# Altium PCB xksoilsensor.PcbDoc
Units mm, origin at the board's own origin, x right, y up, seen from the top; angles counter-clockwise.
Board outline 63.12 x 55.12 mm, 2 copper layers (Top Layer, Bottom Layer); 46 components, 37 nets, 176 pads, 26 vias.
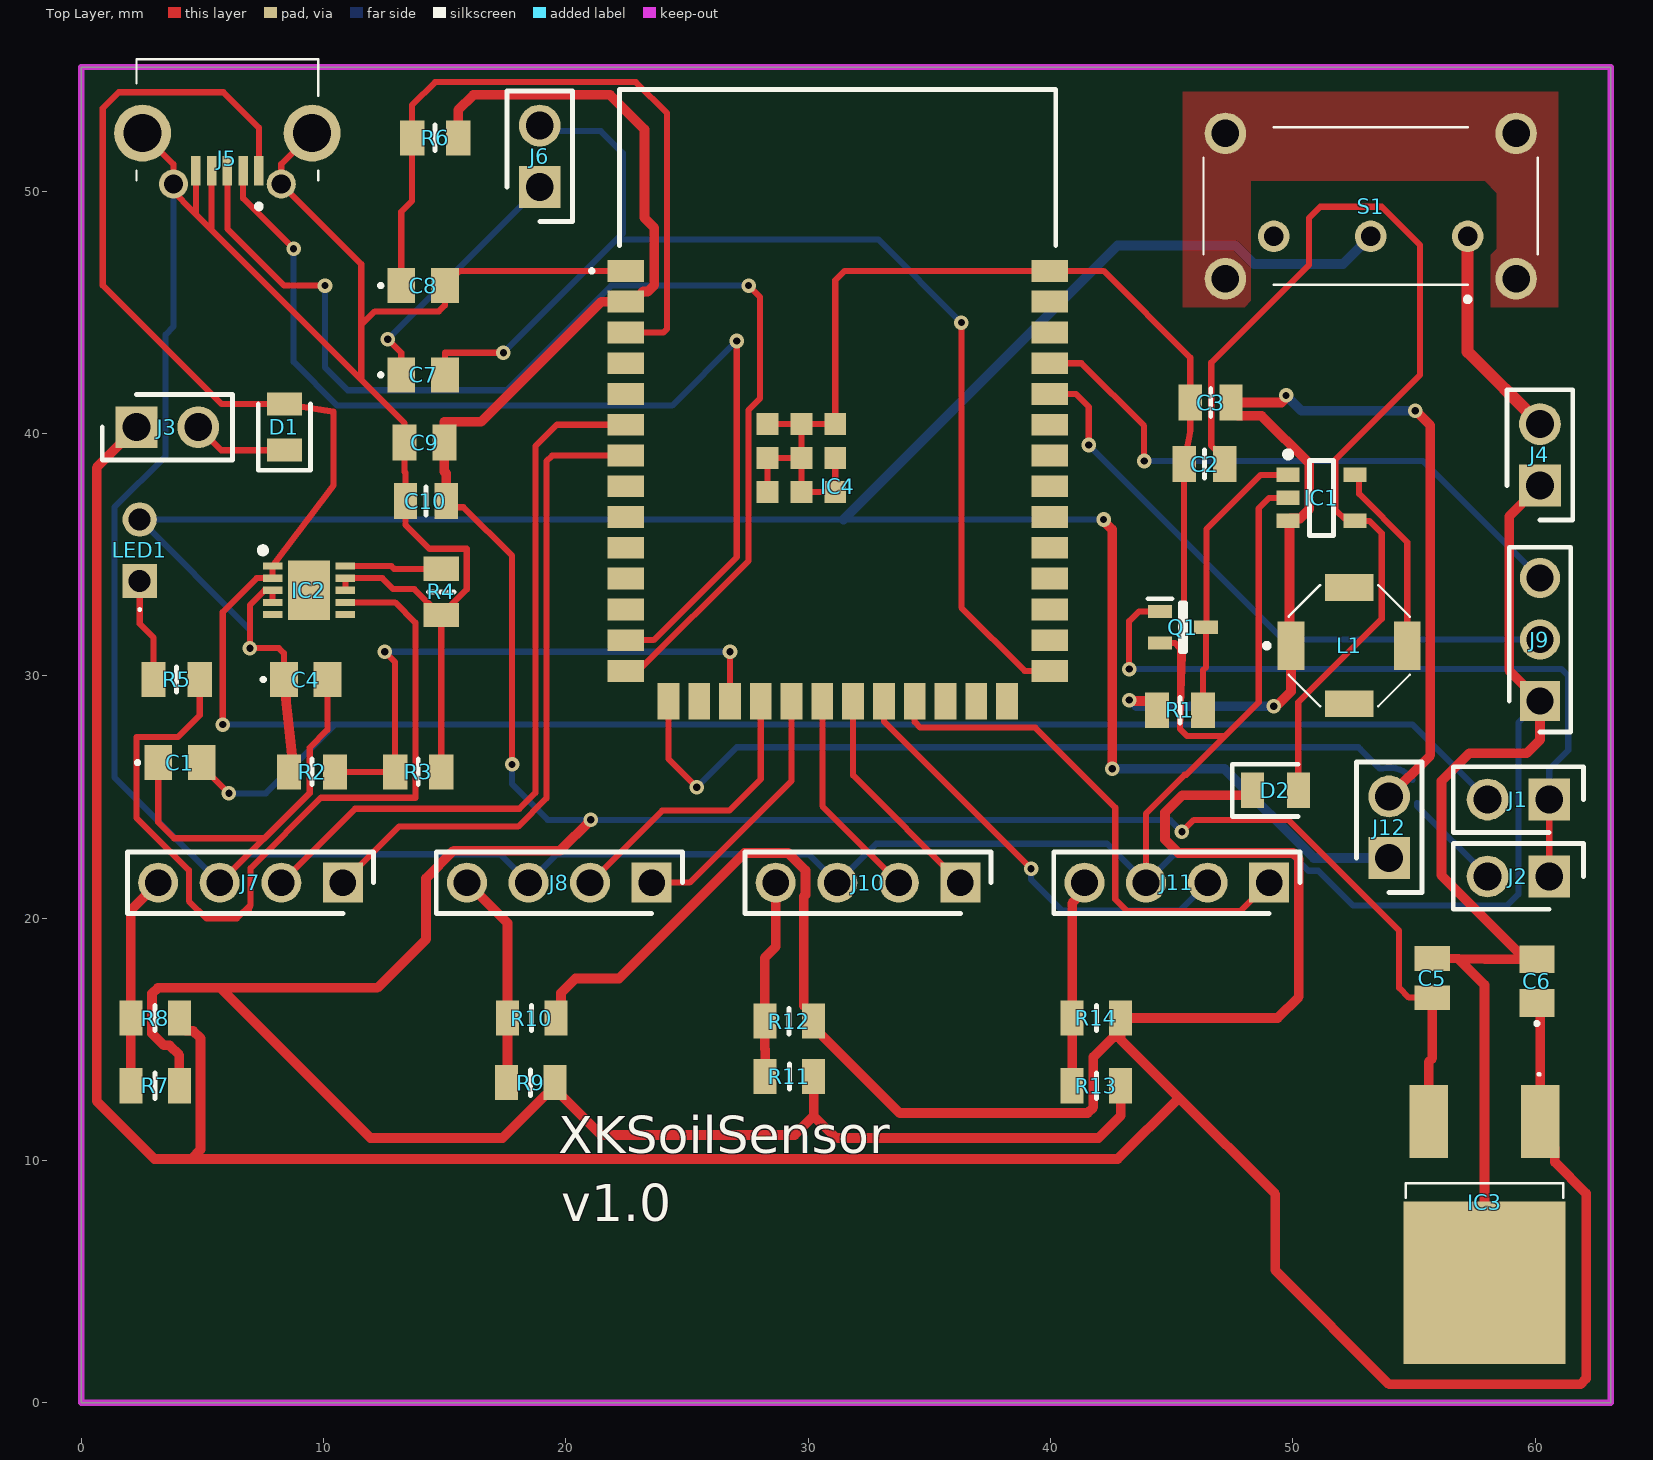
[diagram p0: Top Layer view]
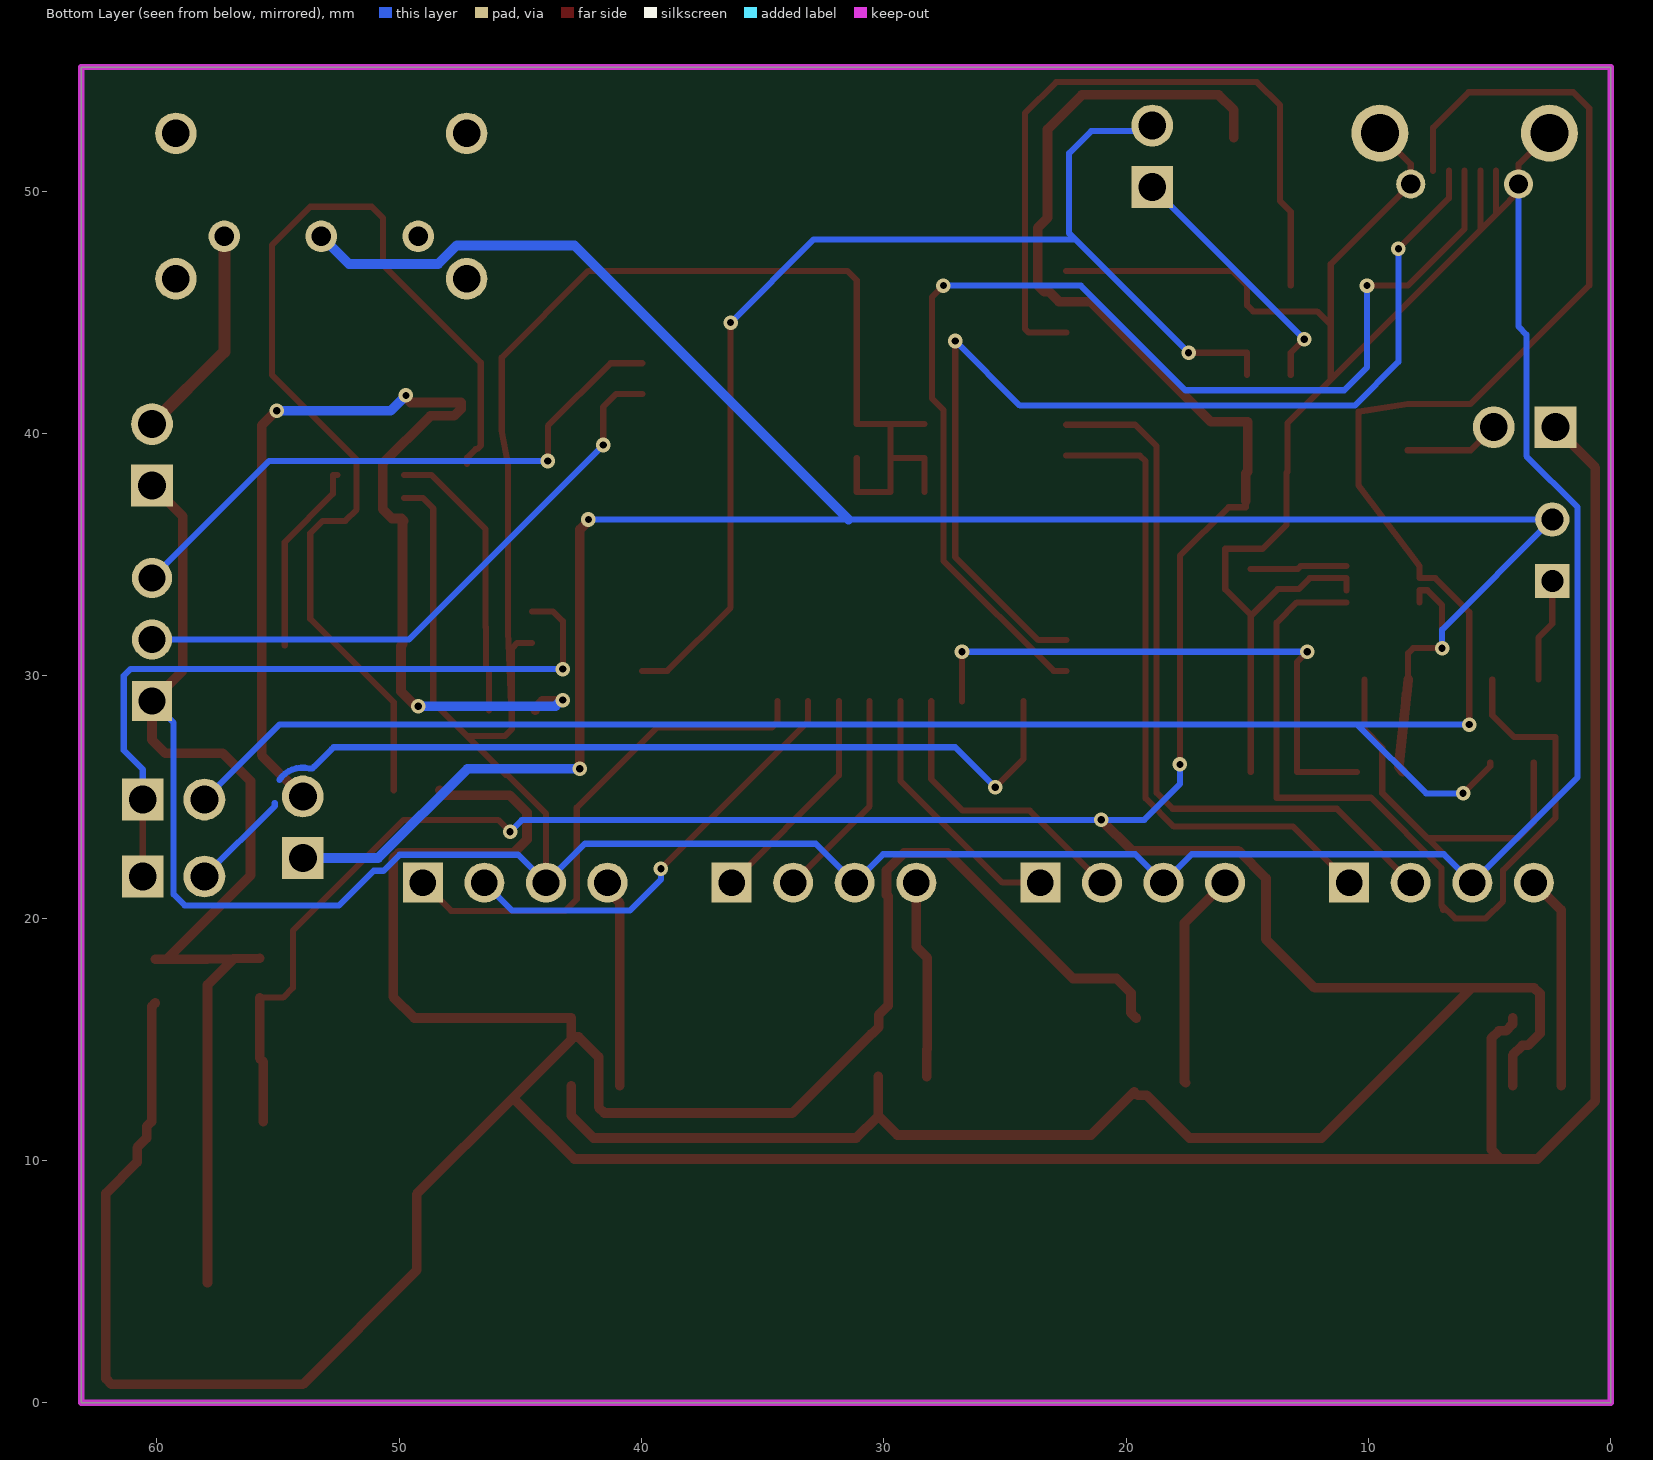
[diagram p1: Bottom Layer view, seen from below]
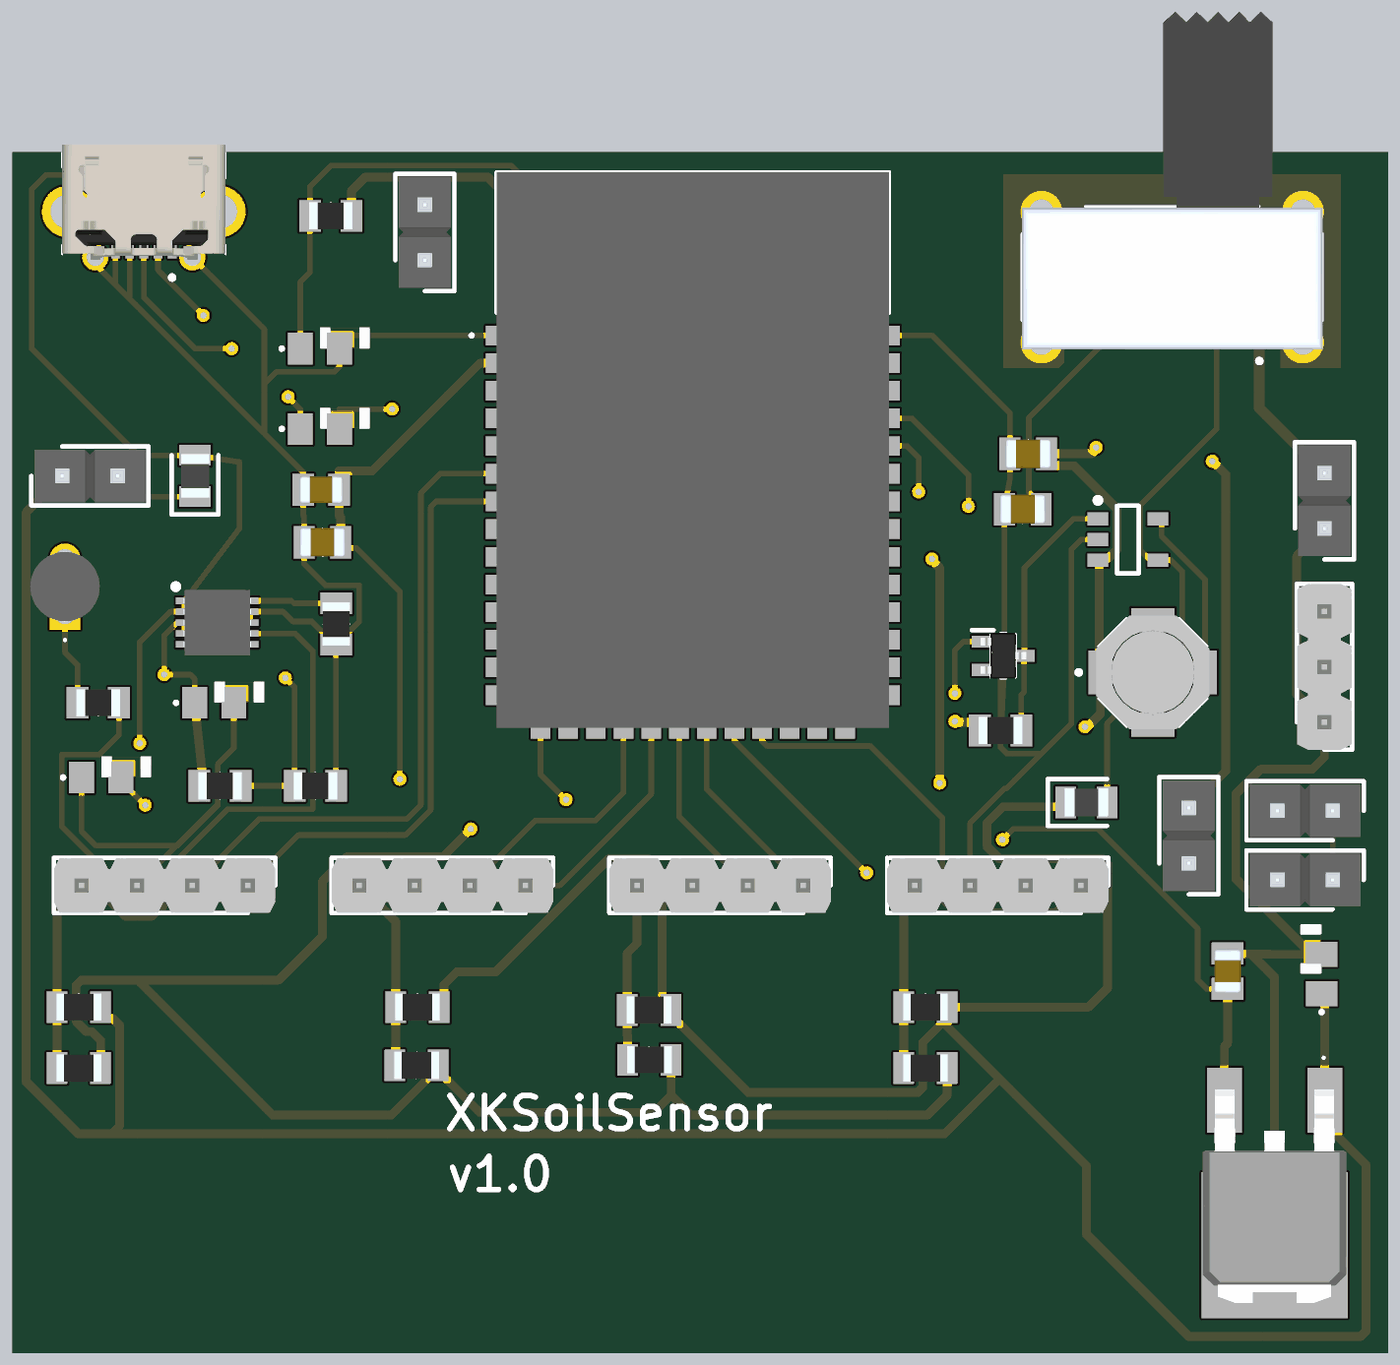
[diagram p2: 3D render of the assembled board from above, using the file's embedded part models]

## Layer stack, top to bottom
Top Solder: solder mask 0.0102, Solder Resist, Dk 3.5
Top Layer: signal copper 0.0356
Dielectric 1: dielectric 0.32, FR-4, Dk 4.8
Bottom Layer: signal copper 0.0356
Bottom Solder: solder mask 0.0102, Solder Resist, Dk 3.5

## Board outline
0,0 63.119,0 63.119,55.118 0,55.118

## Design rules (kind name [scope] priority, off if disabled: settings)
Clearance [All] p1: gap=0.2 ignorepadtopadclearanceinfootprint=FALSE except(0: Arc-Hole Track-Hole SMDPad-Hole THPad-Hole Via-Hole Fill-Hole Poly-Hole Region-Hole Text-Hole)
PolygonConnect PolygonConnect_1 [All vs IsNamedPolygon('NONET_L-01_P-001')] p1: connectstyle=Direct reliefconductorwidth=0.254 reliefentries=4 polygonreliefangle="90 Angle" airgapwidth=0.254
PolygonConnect [All] p2: connectstyle=Relief reliefconductorwidth=0.254 reliefentries=4 polygonreliefangle="90 Angle" airgapwidth=0.254
RoutingVias [All] p1: holewidth=0.711 width=1.27 viastyle="Through Hole" minholewidth=0.711 minwidth=1.27 maxholewidth=0.711 maxwidth=1.27
SolderMaskExpansion [All] p1: expansion=0.102 istentingtop=FALSE
Width [All] p1: maxlimit=1 minlimit=0.2 preferedwidth=0.254
30 further rules are at their usual default settings.

## Classes and differential pairs
component class power: C1 C2 C3 C4 C5 C6 D1 D2 IC1 IC2 IC3 J1 J2 J3 J4 J12 L1 LED1 Q1 R1 R2 R3 R4 R5 S1
component class esp: C7 C8 C9 C10 IC4 J5 J6 J7 J8 J9 J10 J11 R6 R7 R8 R9 R10 R11 R12 R13 R14

## Components (designator, comment, footprint, x,y, rotation, side; value= is the part's Value field where it differs from the comment)
C1 "1uf" C0805 4.075,26.416 r0 top
C2 "1uF" CAPC2114X145N 46.355,38.735 r0 top
C3 "1uF" CAPC2114X145N 46.609,41.275 r0 top
C4 "1uf" C0805 9.26,29.845 r0 top
C5 "2.2uF" CAPC2012X152N 55.753,17.526 r90 top
C6 "0.1uf" C0805 60.071,17.399 r90 top
C7 "0.1uf" C0805 14.108,42.418 r0 top
C8 "1uf" C0805 14.108,46.101 r0 top
C9 "0.1uf" CAPC2012X145N 14.166,39.624 r0 top
C10 "10uF" CAPC2114X145N 14.224,37.211 r0 top
D1 "SD0805S020S0R5" DIOC2013X100N 8.382,40.259 r90 top
D2 "SD0805S020S0R5" DIOC2013X100N 49.276,25.273 r0 top
IC1 "boost" SOT95P280X110-5N 51.181,37.338 r0 top
IC2 "MCP73114-0NSI_MF" SON50P300X300X100-11N-D 9.398,33.528 r0 top
IC3 "LF33CDT-TRY" LD1117DT33 57.912,8.278 r90 top
IC4 "ESP32-S3-WROOM-1-N8R8" ESP32S3WROOM1N8R8 31.218,41.449 r0 top
J1 "10129378-902001BLF" HDRV2W67P0X254_1X2_508X241X843P 60.579,24.892 r180 top
J2 "10129378-902001BLF" HDRV2W67P0X254_1X2_508X241X843P 60.579,21.717 r180 top
J3 "10129378-902001BLF" HDRV2W67P0X254_1X2_508X241X843P 2.286,40.259 r0 top
J4 "10129378-902001BLF" HDRV2W67P0X254_1X2_508X241X843P 60.198,37.846 r90 top
J5 "UJ2-MIBH2-4-SMT-TR" UJ2MIBH24SMTTR 6.03,52.867 r270 top
J6 "10129378-902001BLF" HDRV2W67P0X254_1X2_508X241X843P 18.923,50.165 r90 top
J7 "90120-0764" HDRV4W90P0X254_1X4_994X249X560P 10.795,21.463 r180 top
J8 "90120-0764" HDRV4W90P0X254_1X4_994X249X560P 23.537,21.463 r180 top
J9 "90120-0763" HDRV3W90P0X254_1X3_740X249X560P 60.198,28.956 r90 top
J10 "90120-0764" HDRV4W90P0X254_1X4_994X249X560P 36.28,21.463 r180 top
J11 "90120-0764" HDRV4W90P0X254_1X4_994X249X560P 49.022,21.463 r180 top
J12 "10129378-902001BLF" HDRV2W67P0X254_1X2_508X241X843P 53.975,22.479 r90 top
L1 "SRU5028-470Y" SRU5028 52.324,31.242 r0 top
LED1 "L934LGD" L934LGD 2.413,33.909 r180 top
Q1 "BSS138BKW" SOT65P210X110-3N 45.466,32.004 r0 top
R1 "300R" RESC2012X65N 45.339,28.575 r0 top
R2 "100k" RESC2012X60N 9.525,26.035 r180 top
R3 "200k" RESC2012X65N 13.904,26.035 r0 top
R4 "2k" RESC2012X65N 14.859,33.462 r270 top
R5 "300R" RESC2012X65N 3.937,29.845 r180 top
R6 "10k" RESC2012X65N 14.605,52.197 r0 top
R7 "CRCW08050000Z0EB" RESC2012X50N 3.048,13.081 r0 top
R8 "CRCW08050000Z0EB" RESC2012X50N 3.048,15.875 r0 top
R9 "CRCW08050000Z0EB" RESC2012X50N 18.542,13.208 r0 top
R10 "CRCW08050000Z0EB" RESC2012X50N 18.586,15.875 r0 top
R11 "CRCW08050000Z0EB" RESC2012X50N 29.226,13.462 r0 top
R12 "CRCW08050000Z0EB" RESC2012X50N 29.21,15.748 r0 top
R13 "CRCW08050000Z0EB" RESC2012X50N 41.894,13.081 r0 top
R14 "CRCW08050000Z0EB" RESC2012X50N 41.894,15.875 r0 top
S1 "EG1224" EG1224 57.213,48.133 r180 top

## Footprints (in the part's own frame and the unit in brackets; to place one, negate y for a bottom-side part, rotate by r counter-clockwise, add the part's x,y. Pads: shape width x height; smd on the part's side, far side on the other; paste and mask are expansions set on the pad)
C0805 [mm]
  rect 1.15x1.45 smd: 1(-0.9,0) 2(0.9,0)
  silkscreen extent -1.8,-0.05 -1.7,0.05, body extent 0,0 2.3,0.98
CAPC2012X145N [mm]
  rect 0.99x1.47 smd: 1(-0.82,0) 2(0.82,0)
  body extent -1,-0.63 1,0.63, height 1.45
CAPC2012X152N [mm]
  rect 1.02x1.47 smd: 1(-0.81,0) 2(0.81,0)
  body extent -1,-0.63 1,0.63, height 1.52
CAPC2114X145N [mm]
  rect 0.96x1.49 smd: 1(-0.84,0) 2(0.84,0)
  silkscreen extent 0,-0.58 0,0.58, body extent -1.05,-0.67 1.05,0.67, height 1.45
DIOC2013X100N [mm]
  rect 0.95x1.45 smd: 1(-0.95,0) 2(0.95,0)
  silkscreen extent -1.78,-1.07 0.95,1.07, body extent -1,-0.65 1,0.65, height 1
EG1224 [mm]
  round 1.3 hole 0.8: 1(0,0) 2(4,0) 3(8,0)
  round 1.71 hole 1.14: MH1(-2,-4.25) MH2(-2,1.75) MH3(10,1.75) MH4(10,-4.25)
  silkscreen extent -2.9,-4.5 10.9,2.7, body extent -2.9,-13.43 10.9,2.07, height 8.5
ESP32S3WROOM1N8R8 [mm]
  rect 1.5x0.9 smd: 1(-8.75,5.26) 2(-8.75,3.99) 3(-8.75,2.72) 4(-8.75,1.45) 5(-8.75,0.18) 6(-8.75,-1.09) 7(-8.75,-2.36) 8(-8.75,-3.63) 9(-8.75,-4.9) 10(-8.75,-6.17) 11(-8.75,-7.44) 12(-8.75,-8.71) 13(-8.75,-9.98) 14(-8.75,-11.25) 27(8.75,-11.25) 28(8.75,-9.98) 29(8.75,-8.71) 30(8.75,-7.44) 31(8.75,-6.17) 32(8.75,-4.9) 33(8.75,-3.63) 34(8.75,-2.36) 35(8.75,-1.09) 36(8.75,0.18) 37(8.75,1.45) 38(8.75,2.72) 39(8.75,3.99) 40(8.75,5.26)
  rect 0.9x1.5 smd: 15(-6.985,-12.5) 16(-5.715,-12.5) 17(-4.445,-12.5) 18(-3.175,-12.5) 19(-1.905,-12.5) 20(-0.635,-12.5) 21(0.635,-12.5) 22(1.905,-12.5) 23(3.175,-12.5) 24(4.445,-12.5) 25(5.715,-12.5) 26(6.985,-12.5)
  rect 0.9x0.9 smd: 41(-1.5,-2.46) 42(-1.5,-1.06) 43(-2.9,-1.06) 44(-2.9,-2.46) 45(-2.9,-3.86) 46(-1.5,-3.86) 47(-0.1,-3.86) 48(-0.1,-2.46) 49(-0.1,-1.06)
  silkscreen extent -10.2,5.21 9,12.75, body extent -9,-12.75 9,12.75, height 3.35
HDRV2W67P0X254_1X2_508X241X843P [mm]
  rect 1.725x1.725 hole 1.15: 1(0,0)
  round 1.725 hole 1.15: 2(2.54,0)
  silkscreen extent -1.42,-1.35 3.96,1.35, body extent -1.27,-1.2 3.81,1.2, height 8.43
HDRV3W90P0X254_1X3_740X249X560P [mm]
  rect 1.65x1.65 hole 1.1: 1(0,0)
  round 1.65 hole 1.1: 2(2.54,0) 3(5.08,0)
  silkscreen extent -1.27,-1.27 6.35,1.27, body extent -1.27,-1.25 6.35,1.25, height 5.37
HDRV4W90P0X254_1X4_994X249X560P [mm]
  rect 1.65x1.65 hole 1.1: 1(0,0)
  round 1.65 hole 1.1: 2(2.54,0) 3(5.08,0) 4(7.62,0)
  silkscreen extent -1.27,-1.27 8.89,1.27, body extent -1.27,-1.25 8.89,1.25, height 5.3
L934LGD [mm]
  rect 1.416x1.416 hole 0.91: 1(0,0)
  round 1.416 hole 0.91: 2(0,-2.54)
  silkscreen extent -0.05,1.13 0.05,1.23, body extent -1.6,-2.89 1.6,0.35, height 5.75
LD1117DT33 [mm]
  rect 3x1.6 smd: 1(3.325,-2.3) 2(3.325,2.3)
  rect 6.7x6.7 smd: 3(-3.325,0)
  silkscreen extent 0.18,-3.25 5.32,3.25, body extent -5.98,-3.3 3.82,3.3, height 2.4
RESC2012X50N [mm]
  rect 0.95x1.45 smd: 1(-1,0) 2(1,0)
  silkscreen extent 0,-0.53 0,0.53, body extent -1.02,-0.63 1.02,0.63, height 0.5
RESC2012X60N [mm]
  rect 1x1.45 smd: 1(-0.95,0) 2(0.95,0)
  silkscreen extent 0,-0.53 0,0.53, body extent -1,-0.63 1,0.63, height 0.6
RESC2012X65N [mm]
  rect 1x1.45 smd: 1(-0.95,0) 2(0.95,0)
  silkscreen extent 0,-0.53 0,0.53, body extent -1,-0.63 1,0.63, height 0.65
SON50P300X300X100-11N-D [mm]
  rect 0.8x0.3 smd: 1(-1.5,1) 2(-1.5,0.5) 3(-1.5,0) 4(-1.5,-0.5) 5(-1.5,-1) 6(1.5,-1) 7(1.5,-0.5) 8(1.5,0) 9(1.5,0.5) 10(1.5,1)
  rect 1.75x2.45 smd: 11(0,0)
  silkscreen extent -2.02,1.53 -1.77,1.77, body extent -1.55,-1.5 1.55,1.5, height 1
SOT65P210X110-3N [mm]
  rect 1x0.55 smd: 1(-0.95,0.65) 2(-0.95,-0.65) 3(0.95,0)
  silkscreen extent -1.45,-1 0.1,1.18, body extent -1.05,-1.05 1.05,1.05, height 0.95
SOT95P280X110-5N [mm] "SOT23, 5-Leads, Body 2,90x2,80mm, Pitch 0,95mm, IPC Medium Density"
  rect 0.95x0.6 smd: 1(-1.375,0.95) 2(-1.375,0) 3(-1.375,-0.95) 4(1.375,-0.95) 5(1.375,0.95)
  silkscreen extent -1.5,-1.55 0.5,1.92, body extent -0.9,-1.55 0.9,1.55, height 1.1
SRU5028 [mm]
  rect 1.1x2 smd: 1(-2.4,0) 2(2.4,0)
  rect 2x1.1 smd: 3(0,2.4) 4(0,-2.4)
  silkscreen extent -3.5,-2.5 2.5,2.5, body extent -2.6,-2.6 2.6,2.6, height 2.8
UJ2MIBH24SMTTR [mm]
  rect 1.2x0.4 smd: 1(2.025,1.3) 2(2.025,0.65) 3(2.025,0) 4(2.025,-0.65) 5(2.025,-1.3)
  round 1.2 hole 0.8: MH1(2.575,2.225) MH2(2.575,-2.225)
  round 2.348 hole 1.565: MH3(0.475,-3.5) MH4(0.475,3.5)
  silkscreen extent -2.58,-3.75 3.6,3.75, body extent -2.6,-3.75 2.69,3.75, height 2.77

## Part data
C1 C4 C6 C7 C8: library part C0805C104J5RACTM, "Capacitor", Manufacturer_Name=KEMET, Datasheet Link=https://content.kemet.com/datasheets/KEM_C1002_X7R_SMD.pdf, Height=1.1mm, Manufacturer_Part_Number=C0805C104J5RACTM
C2 C3 C10: library part LMR212BD7106KG-T, "Capacitor", Manufacturer_Name="TAIYO YUDEN", Mouser Part Number=963-LMR212BD7106KG-T, Datasheet Link=https://www.mouser.de/datasheet/2/396/TAIY_S_A0012830329_1-2514546.pdf, Height=1.45mm, Manufacturer_Part_Number=LMR212BD7106KG-T, Mouser Price/Stock=https://www.mouser.co.uk/ProductDetail/Taiyo-Yuden/LMR212BD7106KG-T?qs=DRkmTr78QATXuUQGmCCYPQ%3D%3D
C5: library part 08055C225KAT2A, "Capacitor", Manufacturer_Name=AVX, Mouser Part Number=581-08055C225KAT2A, Arrow Part Number=08055C225KAT2A, Arrow Price/Stock=https://www.arrow.com/en/products/08055c225kat2a/avx, Datasheet Link=http://datasheets.avx.com/X7RDielectric.pdf, Height=1.52mm, Manufacturer_Part_Number=08055C225KAT2A, Mouser Price/Stock=https://www.mouser.co.uk/ProductDetail/AVX/08055C225KAT2A?qs=F5vmRhUsTTrD4i7cuGJbzw%3D%3D
C9: library part VJ0805Y104KXAAT, "Capacitor", Manufacturer_Name=Vishay, Mouser Part Number=77-VJ0805Y104KXAAT, Arrow Part Number=VJ0805Y104KXAAT, Arrow Price/Stock=https://www.arrow.com/en/products/vj0805y104kxaat/vishay, Datasheet Link=http://www.vishay.com/docs/45226/vj31xrohsautomlcc.pdf, Height=1.45mm, Manufacturer_Part_Number=VJ0805Y104KXAAT, Mouser Price/Stock=https://www.mouser.co.uk/ProductDetail/Vishay-Vitramon/VJ0805Y104KXAAT?qs=mS8Fuotq4gGV9PmUlyRo%2FA%3D%3D
D1 D2: "Diode", Manufacturer_Name=AVX, Mouser Part Number=581-SD0805S020S0R5, Arrow Part Number=SD0805S020S0R5, Arrow Price/Stock=https://www.arrow.com/en/products/sd0805s020s0r5/avx, Datasheet Link=https://datasheets.kyocera-avx.com/schottky.pdf, Height=1mm, Manufacturer_Part_Number=SD0805S020S0R5, Mouser Price/Stock=https://www.mouser.co.uk/ProductDetail/AVX/SD0805S020S0R5?qs=jCA%252BPfw4LHZ%252BeTNuLGlRmA%3D%3D
IC2: "Integrated Circuit", Arrow Part Number=MCP73114-0NSI/MF, Manufacturer_Name=Microchip, Mouser Part Number=579-MCP73114-0NSI/MF, Arrow Price/Stock=https://www.arrow.com/en/products/mcp73114-0nsimf/microchip-technology, Datasheet Link=http://ww1.microchip.com/downloads/en/DeviceDoc/20002183E.pdf, Height=1mm, Manufacturer_Part_Number=MCP73114-0NSI/MF, Mouser Price/Stock=https://www.mouser.co.uk/ProductDetail/Microchip-Technology/MCP73114-0NSI-MF?qs=E6wAi2XWqcO2fCdY3OHx7w%3D%3D
IC3: "Integrated Circuit", Manufacturer_Name=STMicroelectronics, Mouser Part Number=511-LF33CDT-TRY, Arrow Part Number=LF33CDT-TRY, Arrow Price/Stock=https://www.arrow.com/en/products/lf33cdt-try/stmicroelectronics?region=nac, Datasheet Link=https://www.st.com/resource/en/datasheet/lfxx.pdf, Height=2mm, Manufacturer_Part_Number=LF33CDT-TRY, Mouser Price/Stock=https://www.mouser.co.uk/ProductDetail/STMicroelectronics/LF33CDT-TRY?qs=fnYUjNMxfVBCqlsIwZoKRw%3D%3D
IC4: "Integrated Circuit", Manufacturer_Name="Espressif Systems", Mouser Part Number=356-EP32S3WROOM1N8R8, Datasheet Link=https://www.espressif.com/sites/default/files/documentation/esp32-s3-wroom-1_wroom-1u_datasheet_en.pdf, Height=3.25mm, Manufacturer_Part_Number=ESP32-S3-WROOM-1-N8R8, Mouser Price/Stock=https://www.mouser.co.uk/ProductDetail/Espressif-Systems/ESP32-S3-WROOM-1-N8R8?qs=7D1LtPJG0i3%2F28hKFavOpQ%3D%3D
J1 J2 J3 J4 J6 J12: "Connector", Manufacturer_Name=Amphenol, Mouser Part Number=649-1012937890201BLF, Arrow Part Number=10129378-902001BLF, Arrow Price/Stock=https://www.arrow.com/en/products/10129378-902001blf/amphenol-fci?region=nac, Datasheet Link=https://www.mouser.co.uk/datasheet/2/18/10129378-1530218.pdf, Height=8.43mm, Manufacturer_Part_Number=10129378-902001BLF, Mouser Price/Stock=https://www.mouser.co.uk/ProductDetail/Amphenol-FCI/10129378-902001BLF?qs=0lQeLiL1qybv6C1q0T3%2FPw%3D%3D
J5: "Connector", Manufacturer_Name="CUI Inc.", Mouser Part Number=490-UJ2-MIBH2-4-SMT, Arrow Part Number=UJ2-MIBH2-4-SMT-TR, Arrow Price/Stock=https://www.arrow.com/en/products/uj2-mibh2-4-smt-tr/cui-devices?region=nac, Datasheet Link=https://www.cui.com/product/resource/digikeypdf/uj2-mibh2-4-smt.pdf, Height=2.5mm, Manufacturer_Part_Number=UJ2-MIBH2-4-SMT-TR, Mouser Price/Stock=https://www.mouser.co.uk/ProductDetail/CUI-Devices/UJ2-MIBH2-4-SMT-TR?qs=5mqXD9RfOg1yxHIpPvPxvQ%3D%3D
J7 J8 J10 J11: "Connector", Manufacturer_Name=Molex, Mouser Part Number=538-90120-0764, Datasheet Link=https://www.molex.com/webdocs/datasheets/pdf/en-us/0901200764_PCB_HEADERS.pdf, Height=5.6mm, Manufacturer_Part_Number=90120-0764, Mouser Price/Stock=https://www.mouser.co.uk/ProductDetail/Molex/90120-0764?qs=QSnLD11VNirsMTdnHEPG3Q%3D%3D
J9: "Connector", Manufacturer_Name=Molex, Mouser Part Number=538-90120-0763, Datasheet Link=http://www.molex.com/webdocs/datasheets/pdf/en-us/0901200763_PCB_HEADERS.pdf, Height=5.6mm, Manufacturer_Part_Number=90120-0763, Mouser Price/Stock=https://www.mouser.co.uk/ProductDetail/Molex/90120-0763?qs=BLN8Q0P37WbEQIErCRrCtQ%3D%3D
L1: "Inductor", Manufacturer_Name=Bourns, Mouser Part Number=652-SRU5028-470Y, Arrow Part Number=SRU5028-470Y, Arrow Price/Stock=https://www.arrow.com/en/products/sru5028-470y/bourns?region=nac, Datasheet Link=https://www.bourns.com/docs/Product-Datasheets/SRU5028.pdf, Manufacturer_Part_Number=SRU5028-470Y, Mouser Price/Stock=https://www.mouser.co.uk/ProductDetail/Bourns/SRU5028-470Y?qs=q9ZR8LvBB%2Fv3savKPF%252BPQg%3D%3D
LED1: "LED", Manufacturer_Name=Kingbright, Mouser Part Number=604-L934LGD, Datasheet Link=https://www.datasheetq.com/datasheet-download/128932/1/Kingbright/L934LGD, Height=5.65mm, Manufacturer_Part_Number=L934LGD, Mouser Price/Stock=https://www.mouser.co.uk/ProductDetail/Kingbright/L934LGD?qs=JpELLRhtMc0h5yVTzmoC8Q%3D%3D
Q1: "MOSFET (N-Channel)", Manufacturer_Name=Nexperia, Mouser Part Number=N/A, Datasheet Link=https://datasheet.datasheetarchive.com/originals/distributors/Datasheets-NXP/DSANXP010002283.pdf, Height=1.1mm, Manufacturer_Part_Number=BSS138BKW, Mouser Price/Stock=https://www.mouser.com/Search/Refine.aspx?Keyword=N%2FA
R1 R5: library part CPF0805B300RE1, "Resistor", Manufacturer_Name="TE Connectivity", Mouser Part Number=279-CPF0805B300RE1, Arrow Part Number=CPF0805B300RE1, Arrow Price/Stock=https://www.arrow.com/en/products/cpf0805b300re1/te-connectivity, Datasheet Link=https://datasheet.datasheetarchive.com/originals/distributors/DKDS-21/401696.pdf, Height=0.65mm, Manufacturer_Part_Number=CPF0805B300RE1, Mouser Price/Stock=https://www.mouser.co.uk/ProductDetail/TE-Connectivity-Holsworthy/CPF0805B300RE1?qs=9ylKvqdyudms1bwrHl3aqw%3D%3D
R2: library part CRCW0805100KFKEAHP, "Resistor", Manufacturer_Name=Vishay, Mouser Part Number=71-CRCW0805100KFKEAH, Arrow Part Number=CRCW0805100KFKEAHP, Arrow Price/Stock=https://www.arrow.com/en/products/crcw0805100kfkeahp/vishay?region=nac, Datasheet Link=https://componentsearchengine.com/Datasheets/1/CRCW08051R00FKEAHP.pdf, Height=0.6mm, Manufacturer_Part_Number=CRCW0805100KFKEAHP, Mouser Price/Stock=https://www.mouser.co.uk/ProductDetail/Vishay-Dale/CRCW0805100KFKEAHP?qs=k2%2FDWSARqgFvzezk%252B9pwaw%3D%3D
R3: library part CPF0805B200KE, "Resistor", Manufacturer_Name="TE Connectivity", Datasheet Link=https://datasheet.datasheetarchive.com/originals/distributors/Datasheets_SAMA/2fea3103b7d103f8f6e5715885d434f0.pdf, Height=0.65mm, Manufacturer_Part_Number=CPF0805B200KE
R4: library part CPF0805B2K1E, "Resistor", Manufacturer_Name="TE Connectivity", Mouser Part Number=N/A, Height=0.65mm, Manufacturer_Part_Number=CPF0805B2K1E, Mouser Price/Stock=https://www.mouser.co.uk/ProductDetail/TE-Connectivity-Neohm/CPF0805B2K1E?qs=chTDxNqvsylAMDxdeLsX9w%3D%3D
R6: library part CPF0805B10K5E1, "Resistor", Manufacturer_Name="TE Connectivity", Mouser Part Number=279-CPF0805B10K5E1, Datasheet Link=https://datasheet.datasheetarchive.com/originals/distributors/DKDS-21/401696.pdf, Height=0.65mm, Manufacturer_Part_Number=CPF0805B10K5E1, Mouser Price/Stock=https://www.mouser.com/Search/Refine.aspx?Keyword=279-CPF0805B10K5E1
R7 R8 R9 R10 R11 R12 R13 R14: "Resistor", Manufacturer_Name=Vishay, Mouser Part Number=71-CRCW08050000Z0EB, Arrow Part Number=CRCW08050000Z0EB, Arrow Price/Stock=https://www.arrow.com/en/products/crcw08050000z0eb/vishay, Datasheet Link=http://www.vishay.com/docs/20035/dcrcwe3.pdf, Height=0.5mm, Manufacturer_Part_Number=CRCW08050000Z0EB, Mouser Price/Stock=https://www.mouser.co.uk/ProductDetail/Vishay-Dale/CRCW08050000Z0EB?qs=LOX6nxTstiY0zjlRUzYOBg%3D%3D
S1: "Switch", Manufacturer_Name=E-Switch, Mouser Part Number=612-EG1224, Datasheet Link=http://www.mouser.com/datasheet/2/140/EG-345873.pdf, Height=8.5mm, Manufacturer_Part_Number=EG1224, Mouser Price/Stock=https://www.mouser.co.uk/ProductDetail/E-Switch/EG1224?qs=HKd%2Fp3M7KlUMARNITVNimA%3D%3D

## Via types
v1: diameter 0.6, hole 0.3, Top Layer to Bottom Layer, 26 vias

## Nets (pads, with @x,y where several pads share a name; then routed paths per layer and width w, separated by ;. In a path a pad name is that pad's centre, name@x,y a point inside that pad or via, vN(x,y) a via of type N, cw(c..) or ccw(c..) an arc to the next point about the centre after c; other vN are vias at no path point)
3V3: C5.1 C9.2 C10.2 IC3.2 IC4.2 R6.2 R7.2 R9.2 R11.2 R13.2 | length 164.6
  Top Layer w0.254: C10.2 15.064,36.957 15.773,36.957 17.78,34.95 v1(17.78,26.34) ; v1(45.424,23.563) 45.914,24.054 49.809,24.054 54.381,19.482 54.381,17.122 54.788,16.716 C5.1
  Top Layer w0.4: R7.2 4.048,14.342 3.64,14.75 3.407,14.75 2.923,15.234 2.923,16.885 3.157,17.12 5.74,17.12 ; C10.2 15.064,38.354 14.986,38.432 C9.2 14.986,40.488 16.512,40.488 21.463,45.439 22.768,45.439 23.188,45.859 23.384,45.859 23.652,46.128 23.652,48.484 23.241,48.895 23.241,52.553 21.819,53.975 16.18,53.975 15.555,53.35 R6.2 ; v1(21.031,24.054) 19.761,22.784 15.367,22.784 14.224,21.641 14.224,19.124 12.219,17.12 5.74,17.12 ; R11.2 30.226,11.836 ; R13.2 42.894,11.836 41.98,10.922 31.14,10.922 30.226,11.836 ; IC3.2 55.612,14.072 55.753,14.213 C5.1 ; 5.74,17.12 11.938,10.922 17.383,10.922 19.144,12.683 19.521,12.683 19.669,12.831 21.451,11.049 29.439,11.049 30.226,11.836
  Bottom Layer w0.254: v1(17.78,26.34) 17.78,25.527 19.253,24.054 v1(21.031,24.054) 21.039,24.046 44.942,24.046 v1(45.424,23.563)
5V_USB: C1.2 D1.2 IC2.1 IC2.2 J1.2 J5.1 | length 103.7
  Top Layer w0.254: C1.2 4.975,26.266 v1(6.095,25.146) ; v1(5.842,27.986) 5.842,32.631 7.239,34.028 IC2.2 IC2.1 10.414,37.846 10.414,40.894 D1.2 5.791,41.209 0.889,46.111 0.889,53.42 1.549,54.08 5.864,54.08 7.33,52.614 J5.1
  Bottom Layer w0.254: v1(5.842,27.986) 10.46,27.986 ; v1(6.095,25.146) 7.62,25.146 10.46,27.986 ; J1.2 54.945,27.986 10.46,27.986
+5: C6.1 D2.1 IC3.1 J3.1 R8.2 R10.2 R12.2 R14.2 | length 187.6
  Top Layer w0.4: J3.1 1.623,39.596 1.623,39.576 0.635,38.588 0.635,12.446 3.02,10.061 4.544,10.061 ; R8.2 4.048,15.625 4.323,15.35 4.615,15.35 4.923,15.042 4.923,10.44 4.544,10.061 ; R10.2 19.802,16.09 19.802,16.908 20.397,17.503 22.189,17.503 27.374,22.688 29.167,22.688 29.885,21.97 29.885,20.956 29.817,20.888 29.817,16.391 30.21,15.998 R12.2 ; R12.2@30.208,15.746 30.208,15.5 30.485,15.223 30.506,15.223 33.773,11.956 41.535,11.956 41.769,12.19 41.769,14.266 42.593,15.09 42.892,15.09 ; D2.1 48.125,25.072 45.438,25.072 44.724,24.358 44.724,23.247 45.282,22.688 50.013,22.688 50.247,22.454 50.247,16.749 49.375,15.877 42.896,15.877 R14.2 42.892,15.873 42.892,15.09 ; C6.1 60.21,16.36 60.21,11.606 IC3.1 60.417,11.398 60.417,10.922 60.812,10.527 60.812,9.934 62.103,8.643 62.103,0.996 61.869,0.762 53.975,0.762 49.276,5.461 49.276,8.604 45.295,12.585 ; 4.544,10.061 42.771,10.061 45.295,12.585 ; 42.892,15.09 42.892,14.988 45.295,12.585
bat_in: IC4.17 R2.1 R3.1 | length 23.9
  Top Layer w0.254: R2.1 R3.1 12.954,30.556 v1(12.522,30.988) ; IC4.17 v1(26.773,30.988)
  Bottom Layer w0.254: v1(12.522,30.988) v1(26.773,30.988)
BAT_P: C4.1 IC2.3 IC2.4 J12.1 LED1.2 R2.2 S1.2 | length 107.5
  Top Layer w0.254: IC2.4 IC2.3 7.569,33.528 6.96,32.918 v1(6.96,31.14) 8.157,31.14 8.36,30.937 C4.1
  Top Layer w0.4: C4.1 8.426,29.247 8.446,29.063 8.739,26.342 8.739,26.239 8.683,26.169 8.682,26.168 R2.2 ; v1(42.189,36.449) 42.189,36.395 42.545,36.039 v1(42.545,26.162)
  Bottom Layer w0.254: v1(6.96,31.14) 6.96,31.902 LED1.2 31.459,36.449 v1(42.189,36.449)
  Bottom Layer w0.4: 31.459,36.449 42.762,47.752 47.625,47.752 48.387,46.99 52.07,46.99 S1.2 ; v1(42.545,26.162) 47.181,26.162 50.864,22.479 J12.1
CHIP_PU: C8.1 IC4.3 R6.1 | length 29.8
  Top Layer w0.254: C8.1 13.208,49.149 13.655,49.596 R6.1 13.655,53.558 14.599,54.502 22.892,54.502 24.179,53.215 24.179,44.318 24.03,44.169 IC4.3
enable_charger: IC4.15 J2.2 | length 39
  Top Layer w0.254: IC4.15 24.233,26.567 v1(25.4,25.4)
  Bottom Layer w0.254: v1(25.4,25.4) 27.051,27.051 52.705,27.051 52.779,26.977 53.503,26.253 53.577,26.179 53.683,26.179 53.71,26.179 cw(c53.975,25.019) 54.943,25.71 ; 55.135,24.754 55.135,24.727 55.135,24.621 J2.2
GND: C1.1 C2.1 C3.1 C4.2 C5.2 C6.2 C8.2 C9.1 C10.1 IC1.2 IC2.8 IC2.9 IC3.3 IC4.1 IC4.40 IC4.41 IC4.42 IC4.43 IC4.44 IC4.45 IC4.46 IC4.47 IC4.48 IC4.49 J4.1 J5.4 J5.5 J5.MH1 J5.MH2 J5.MH3 J5.MH4 J7.3 J8.3 J9.1 J10.3 J11.3 Q1.2 R3.2 R4.2 | length 304.1
  Top Layer w0.254: J5.MH3 3.805,51.117 J5.MH2 3.643,50.13 4.73,49.042 ; C1.1 3.175,23.952 3.832,23.295 7.547,23.295 ; J5.5 4.73,49.042 ; J5.4 5.38,48.392 ; J7.3 7.547,23.295 ; J5.MH4 8.255,51.117 J5.MH1 11.557,46.99 11.557,44.475 ; C4.2 10.16,27.762 9.428,27.03 9.428,25.176 ; IC2.8 IC2.9 12.421,34.028 12.87,33.579 13.741,33.579 ; R3.2 14.854,32.466 13.741,33.579 ; IC4.1 15.616,46.709 C8.2 15.008,45.285 14.757,45.034 12.116,45.034 11.557,44.475 ; IC4.45 IC4.44 IC4.41 ; IC4.43 IC4.42 ; IC4.48 IC4.47 IC4.46 IC4.41 ; J11.3 43.942,24.321 45.535,25.915 45.6,25.915 47.193,27.508 ; Q1.2 45.125,31.354 45.339,31.14 45.339,27.813 ; IC1.2 49.022,37.338 48.59,36.906 48.59,28.905 47.193,27.508 ; 4.73,49.042 5.38,48.392 ; 5.38,48.392 11.557,42.215 ; 7.547,23.295 9.428,25.176 ; 7.547,23.295 7.572,23.295 9.428,25.151 9.428,25.176 ; 11.557,42.215 13.346,40.426 C9.1 13.346,38.417 13.384,38.379 C10.1 13.384,36.22 14.365,35.239 15.911,35.239 15.911,33.564 R4.2 14.859,32.466 14.836,32.489 13.741,33.579 ; 11.557,42.215 11.557,44.475 ; IC4.41 IC4.42 ; IC4.42 IC4.49 31.118,46.321 31.506,46.709 IC4.40 42.189,46.709 45.769,43.129 C3.1 45.769,40.132 C2.1 45.515,31.835 45.339,27.813 ; 45.339,27.813 45.644,27.508 47.193,27.508
  Top Layer w0.4: C5.2 56.838,18.318 ; IC3.3 57.912,17.244 56.838,18.318 ; C6.2 C6.2@59.601,18.299 ; J4.1 58.928,36.576 58.928,30.226 J9.1 60.198,27.356 59.639,26.797 57.277,26.797 56.134,25.654 56.134,21.766 C6.2@59.601,18.299 ; 56.838,18.318 57.924,18.299 C6.2@59.601,18.299
  Bottom Layer w0.254: J5.MH2 3.805,44.407 3.48,44.082 3.48,39.065 1.372,36.957 1.372,25.806 J7.3 6.883,22.631 17.289,22.631 J8.3 19.626,22.631 30.031,22.631 J10.3 32.806,23.069 42.336,23.069 J11.3 45.094,22.615 49.982,22.615 50.645,21.952 51.048,21.952 52.476,20.523 58.852,20.523 59.309,20.98 59.309,28.067 J9.1
IO0: C7.2 IC4.27 J6.2 | length 49.6
  Top Layer w0.254: C7.2 15.008,43.332 v1(17.424,43.332) ; v1(36.322,44.577) 36.322,32.815 38.938,30.199 IC4.27
  Bottom Layer w0.254: v1(17.424,43.332) 22.098,48.006 ; J6.2 19.152,52.476 21.438,52.476 22.352,51.562 22.352,48.26 22.098,48.006 ; v1(36.322,44.577) 32.893,48.006 22.098,48.006
NetC2_2: C2.2 D2.2 IC1.4 | length 44.2
  Top Layer w0.254: C2.2 47.195,39 46.842,39.353 46.783,39.353 46.634,39.502 46.634,42.926 50.673,46.965 50.673,48.895 51.13,49.352 53.67,49.352 55.245,47.777 55.245,42.406 51.754,38.915 51.754,36.856 52.222,36.388 IC1.4 53.162,36.388 53.67,35.88 53.67,32.349 50.226,28.905 D2.2
NetC3_2: C3.2 IC1.3 J12.2 L1.1 R1.1 | length 47.6
  Top Layer w0.4: v1@43.307,28.956 44.089,28.956 44.389,28.656 R1.1 ; v1@49.276,28.702 49.924,29.35 L1.1 49.865,31.301 49.865,36.329 IC1.3 49.906,36.488 50.297,36.488 50.681,36.872 50.681,38.754 48.705,40.73 47.729,40.73 47.449,41.01 C3.2 49.53,41.275 v1@49.784,41.529 ; J12.2 55.674,26.718 55.674,40.338 v1@55.118,40.894
  Bottom Layer w0.4: v1(43.243,28.996) 43.297,28.996 43.551,28.742 v1(49.212,28.742) ; v1(49.72,41.569) 49.723,41.569 50.358,40.934 v1(55.054,40.934)
NetC7_1: C7.1 J6.1 | length 10.6
  Top Layer w0.254: v1(12.649,43.891) 13.208,43.332 C7.1
  Bottom Layer w0.254: v1(12.649,43.891) J6.1
NetD1_1: D1.1 J3.2 | length 3.9
  Top Layer w0.254: J3.2 5.776,39.309 D1.1
NetIC1_1: IC1.1 Q1.3 R1.2 | length 11.8
  Top Layer w0.254: R1.2 46.289,30.226 46.416,30.353 Q1.3 46.431,32.004 46.431,36.053 48.666,38.288 IC1.1
NetIC1_5: IC1.5 L1.2 | length 8
  Top Layer w0.254: IC1.5 52.73,38.288 52.73,37.503 54.724,35.509 L1.2
NetIC2_7: IC2.7 R5.1 | length 35.4
  Top Layer w0.254: R5.1 4.887,28.372 3.983,27.468 2.273,27.468 2.273,24.143 4.445,21.971 4.445,20.701 5.163,19.983 6.427,19.983 6.985,20.541 ; 6.911,20.327 6.985,20.541 ; IC2.7 12.954,33.028 13.792,32.19 13.792,24.968 9.888,24.968 6.985,22.065 6.985,20.541
NetIC2_10: IC2.10 R4.1 | length 4
  Top Layer w0.254: IC2.10 12.802,34.528 12.918,34.412 R4.1
NetIC4_6: IC4.6 J7.2 | length 30.4
  Top Layer w0.254: J7.2 11.303,24.511 18.082,24.511 18.742,25.171 18.742,39.472 19.629,40.359 IC4.6
NetIC4_7: IC4.7 J7.1 | length 27.1
  Top Layer w0.254: J7.1 13.106,23.774 18.03,23.774 19.196,24.94 19.196,38.854 19.431,39.089 IC4.7
NetIC4_13: IC4.13 J5.2 | length 43.8
  Top Layer w0.254: J5.2 6.68,49.708 v1(8.763,47.625) ; IC4.13 23.622,31.469 27.051,34.898 v1(27.051,43.815)
  Bottom Layer w0.254: v1(8.763,47.625) 8.763,42.951 10.566,41.148 24.384,41.148 v1(27.051,43.815)
NetIC4_14: IC4.14 J5.3 | length 49.1
  Top Layer w0.254: J5.3 6.03,48.446 8.375,46.101 v1(10.058,46.101) ; IC4.14 22.994,30.199 27.541,34.746 27.541,40.974 28.013,41.446 28.013,45.626 v1(27.538,46.101)
  Bottom Layer w0.254: v1(10.058,46.101) 10.058,42.723 10.998,41.783 17.551,41.783 21.869,46.101 v1(27.538,46.101)
NetIC4_18: IC4.18 J8.2 | length 12
  Top Layer w0.254: J8.2 23.972,24.438 26.746,24.438 28.043,25.735 IC4.18
NetIC4_19: IC4.19 J8.1 | length 10.8
  Top Layer w0.254: J8.1 25.108,21.463 29.313,25.668 IC4.19
NetIC4_20: IC4.20 J10.2 | length 8.8
  Top Layer w0.254: IC4.20 30.583,24.62 J10.2
NetIC4_21: IC4.21 J10.1 | length 9.3
  Top Layer w0.254: IC4.21 31.853,25.89 J10.1
NetIC4_22: IC4.22 J11.2 | length 18.2
  Top Layer w0.254: IC4.22 33.123,28.116 v1(39.198,22.041)
  Bottom Layer w0.254: v1(39.198,22.041) 39.198,21.59 40.478,20.311 45.33,20.311 J11.2
NetIC4_23: IC4.23 J11.1 | length 21.4
  Top Layer w0.254: IC4.23 34.393,28.092 34.622,27.864 39.37,27.864 42.672,24.562 42.672,20.777 43.155,20.295 47.854,20.295 J11.1
NetIC4_36: IC4.36 J9.2 | length 25.3
  Top Layer w0.254: IC4.36 41.048,41.629 41.58,41.097 v1(41.58,39.522)
  Bottom Layer w0.254: v1(41.58,39.522) 49.606,31.496 J9.2
NetIC4_37: IC4.37 J9.3 | length 24.7
  Top Layer w0.254: IC4.37 41.275,42.899 43.864,40.31 v1(43.864,38.862)
  Bottom Layer w0.254: v1(43.864,38.862) 55.372,38.862 J9.3
NetJ1_1: J1.1 J2.1 Q1.1 | length 30.3
  Top Layer w0.254: v1(43.245,30.277) 43.245,32.247 43.652,32.654 Q1.1 ; J2.1 J1.1
  Bottom Layer w0.254: v1(43.245,30.277) 61.087,30.277 61.366,29.997 61.366,26.924 60.579,26.137 J1.1
NetJ4_2: J4.2 S1.1 | length 9
  Top Layer w0.5: S1.1 57.213,43.371 J4.2
NetJ7_4: J7.4 R7.1 R8.1 | length 8.8
  Top Layer w0.4: R7.1 R8.1 2.048,20.336 J7.4
NetJ8_4: J8.4 R9.1 R10.1 | length 9
  Top Layer w0.4: J8.4 17.586,19.794 R10.1 17.586,13.252 R9.1
NetJ10_4: J10.4 R11.1 R12.1 | length 8.2
  Top Layer w0.4: R11.1 28.226,14.58 28.21,14.596 R12.1 28.21,18.364 28.66,18.814 J10.4
NetJ11_4: J11.4 R13.1 R14.1 | length 8.6
  Top Layer w0.254: J11.4@41.402,21.124 J11.4
  Top Layer w0.4: R13.1 R14.1 40.894,20.616 J11.4@41.402,21.124
NetLED1_1: LED1.1 R5.2 | length 4.3
  Top Layer w0.254: LED1.1 2.413,32.146 2.987,31.572 R5.2
NetS1_MH1: S1.MH1 S1.MH2 S1.MH3 S1.MH4
pads on no net: IC2.5 IC2.6 IC2.11 IC4.4 IC4.5 IC4.8 IC4.9 IC4.10 IC4.11 IC4.12 IC4.16 IC4.24 IC4.25 IC4.26 IC4.28 IC4.29 IC4.30 IC4.31 IC4.32 IC4.33 IC4.34 IC4.35 IC4.38 IC4.39 L1.3 L1.4 S1.3

## Polygon pours and split planes (outlines as drawn)
NetS1_MH1 on Top Layer "NONET_L-01_P-001" (solid, pour order 0): 45.466,54.102 60.96,54.102 60.96,45.212 58.166,45.212 58.166,47.371 58.42,47.625 58.42,49.911 57.912,50.419 48.26,50.419 48.26,45.466 48.006,45.212 45.466,45.212

## Keep-outs
Keep-Out Layer:
  the board outline again, w0.254

## Silkscreen, mask and mechanical layers (free items; w line width, h text height)
Top Overlay:
  text "XKSoilSensor" at 19.685,10.287 h1.52
  text "v1.0" at 19.812,7.493 h1.52